# Altium PCB Bela_Cape.pcbdoc
Units mil, origin at the board's own origin, x right, y up, seen from the top; angles counter-clockwise.
Board outline 2630.4 x 1770.7 mil, 4 copper layers (Top Layer, In1.Cu, In2.Cu, Bottom Layer), stack 1.4 mil thick; 23 components, 9 nets, 128 pads, 12 vias.
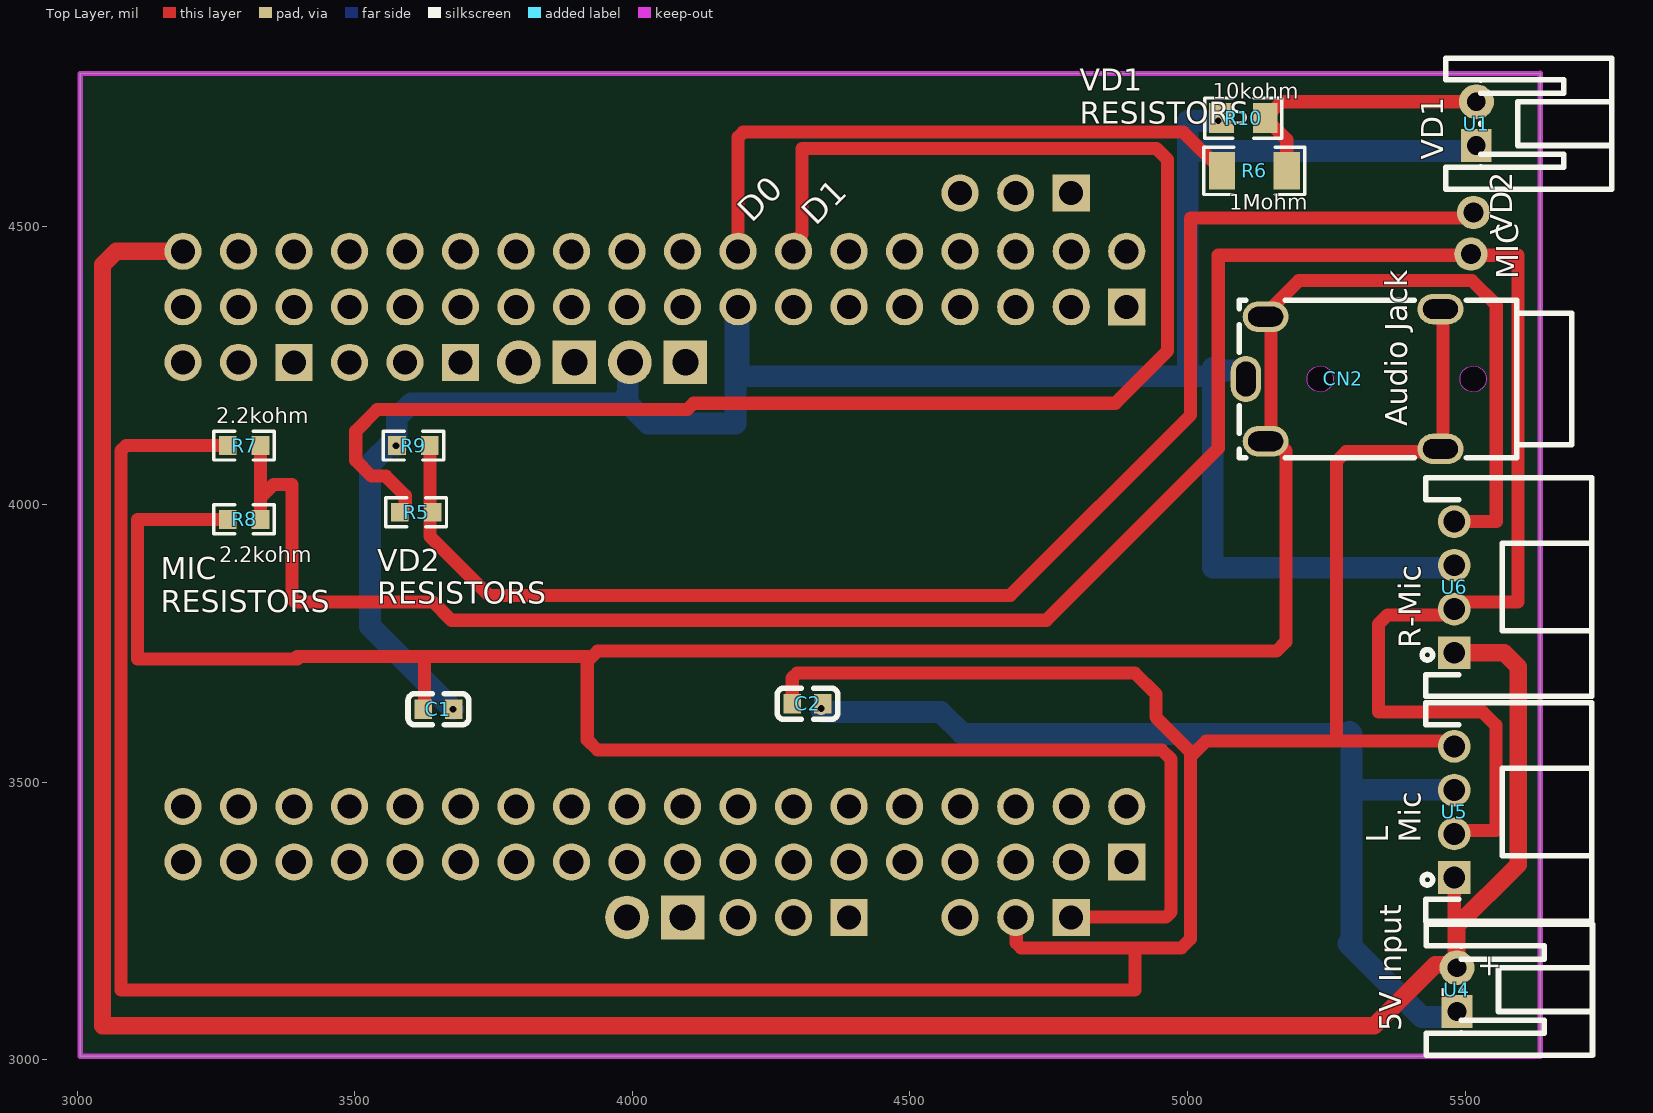
[diagram p0: Top Layer view]
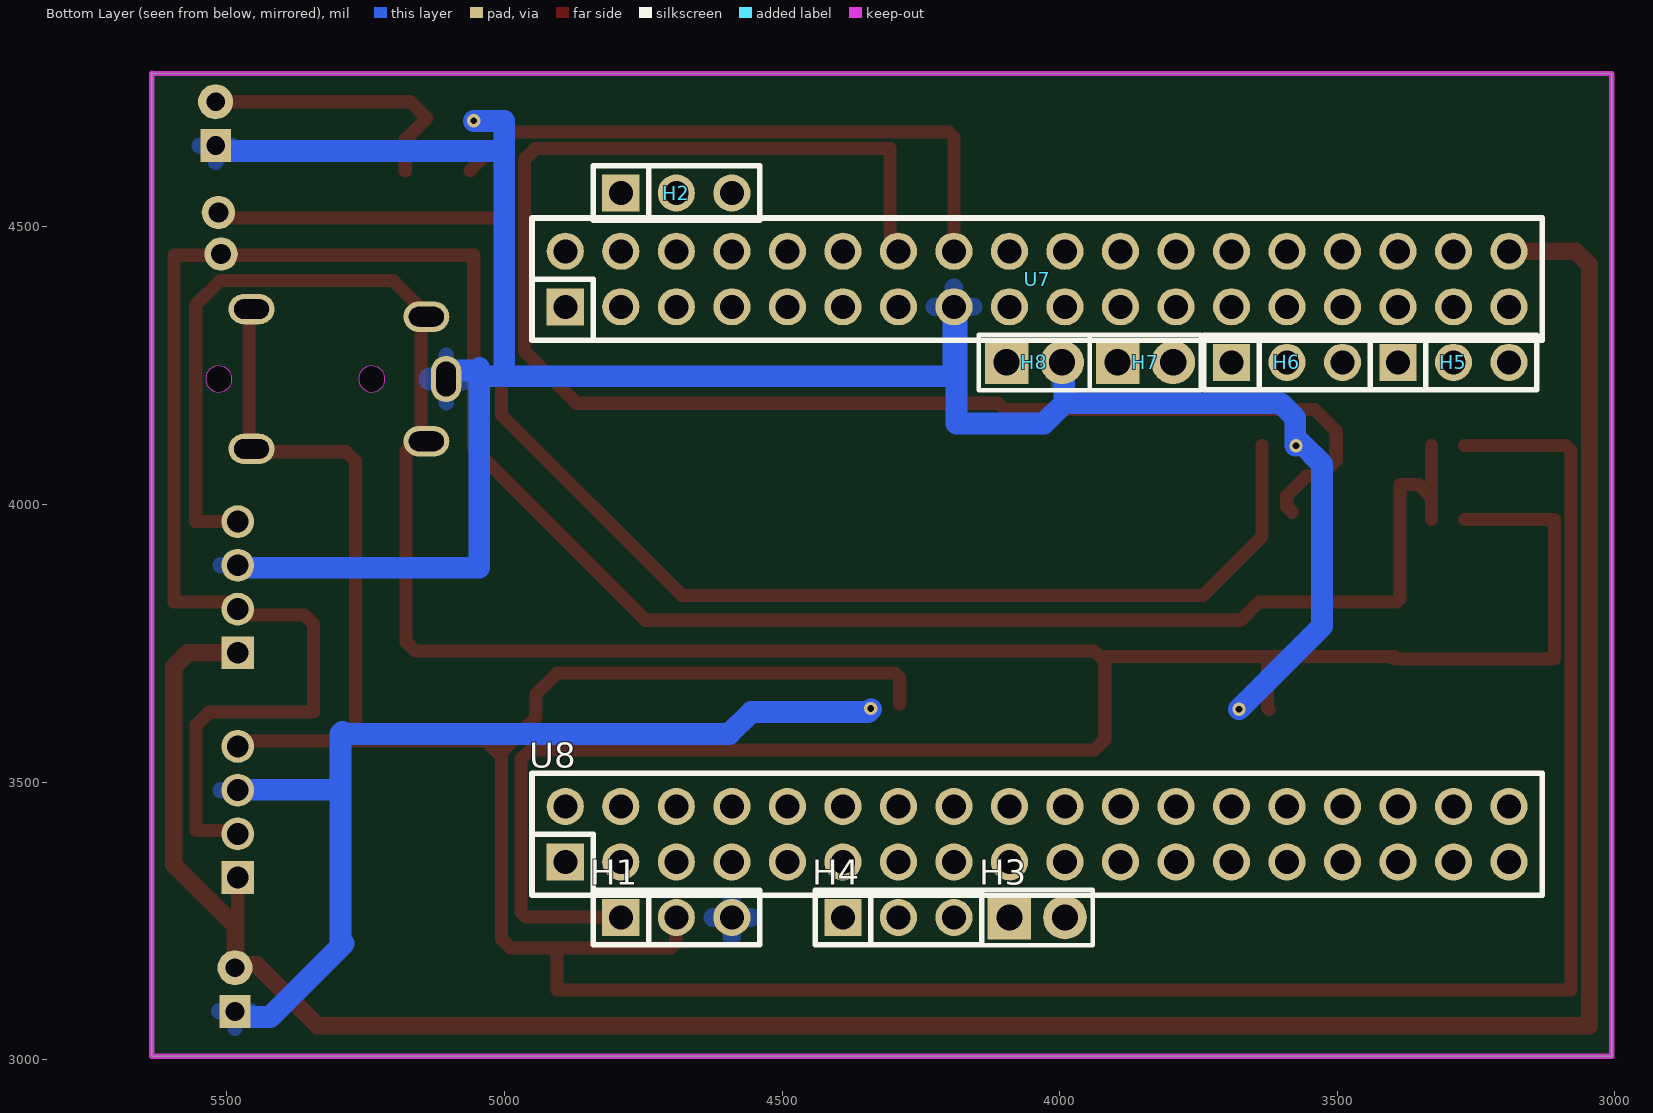
[diagram p1: Bottom Layer view, seen from below]

## Layer stack, top to bottom
Top Layer: signal copper (thickness not stored)
Dielectric1: surface 0.1, FR4, Dk 4.5
In1.Cu: signal copper (thickness not stored)
dielectric 2: surface 1.2, FR4, Dk 4.5
In2.Cu: signal copper (thickness not stored)
dielectric 3: surface 0.1, FR4, Dk 4.5
Bottom Layer: signal copper (thickness not stored)

## Board outline
3005,3006 3005.4,4776 5635.4,4776.7 5635.4,3006

## Design rules (kind name [scope] priority, off if disabled: settings)
BoardOutlineClearance safeClearance [All] p0: genericclearance=10 ignorepadtopadclearanceinfootprint=FALSE except(0: Arc-SplitContinuation Track-SplitContinuation SMDPad-SplitContinuation THPad-SplitContinuation Via-SplitContinuation Fill-SplitContinuation Poly-SplitContinuation Region-SplitContinuation Text-SplitContinuation)
BoardOutlineClearance Plane_innerPlane [All] p0: genericclearance=10 ignorepadtopadclearanceinfootprint=FALSE except(0: Arc-SplitContinuation Track-SplitContinuation SMDPad-SplitContinuation THPad-SplitContinuation Via-SplitContinuation Fill-SplitContinuation Poly-SplitContinuation Region-SplitContinuation Text-SplitContinuation)
BoardOutlineClearance Copper_CopperRegion [All] p0: genericclearance=10 ignorepadtopadclearanceinfootprint=FALSE except(0: Arc-SplitContinuation Track-SplitContinuation SMDPad-SplitContinuation THPad-SplitContinuation Via-SplitContinuation Fill-SplitContinuation Poly-SplitContinuation Region-SplitContinuation Text-SplitContinuation)
BoardOutlineClearance Copper_CopperRegion1 [All] p0: genericclearance=10 ignorepadtopadclearanceinfootprint=FALSE except(0: Arc-SplitContinuation Track-SplitContinuation SMDPad-SplitContinuation THPad-SplitContinuation Via-SplitContinuation Fill-SplitContinuation Poly-SplitContinuation Region-SplitContinuation Text-SplitContinuation)
BoardOutlineClearance Copper_CopperRegion2 [All] p0: genericclearance=10 ignorepadtopadclearanceinfootprint=FALSE except(0: Arc-SplitContinuation Track-SplitContinuation SMDPad-SplitContinuation THPad-SplitContinuation Via-SplitContinuation Fill-SplitContinuation Poly-SplitContinuation Region-SplitContinuation Text-SplitContinuation)
BoardOutlineClearance Copper_CopperRegion3 [All] p0: genericclearance=10 ignorepadtopadclearanceinfootprint=FALSE except(0: Arc-SplitContinuation Track-SplitContinuation SMDPad-SplitContinuation THPad-SplitContinuation Via-SplitContinuation Fill-SplitContinuation Poly-SplitContinuation Region-SplitContinuation Text-SplitContinuation)
BoardOutlineClearance Copper_CopperRegion4 [All] p0: genericclearance=10 ignorepadtopadclearanceinfootprint=FALSE except(0: Arc-SplitContinuation Track-SplitContinuation SMDPad-SplitContinuation THPad-SplitContinuation Via-SplitContinuation Fill-SplitContinuation Poly-SplitContinuation Region-SplitContinuation Text-SplitContinuation)
BoardOutlineClearance Copper_CopperRegion5 [All] p0: genericclearance=10 ignorepadtopadclearanceinfootprint=FALSE except(0: Arc-SplitContinuation Track-SplitContinuation SMDPad-SplitContinuation THPad-SplitContinuation Via-SplitContinuation Fill-SplitContinuation Poly-SplitContinuation Region-SplitContinuation Text-SplitContinuation)
BoardOutlineClearance Copper_CopperRegion6 [All] p0: genericclearance=10 ignorepadtopadclearanceinfootprint=FALSE except(0: Arc-SplitContinuation Track-SplitContinuation SMDPad-SplitContinuation THPad-SplitContinuation Via-SplitContinuation Fill-SplitContinuation Poly-SplitContinuation Region-SplitContinuation Text-SplitContinuation)
BoardOutlineClearance Copper_CopperRegion7 [All] p0: genericclearance=10 ignorepadtopadclearanceinfootprint=FALSE except(0: Arc-SplitContinuation Track-SplitContinuation SMDPad-SplitContinuation THPad-SplitContinuation Via-SplitContinuation Fill-SplitContinuation Poly-SplitContinuation Region-SplitContinuation Text-SplitContinuation)
BoardOutlineClearance Copper_CopperRegion8 [All] p0: genericclearance=10 ignorepadtopadclearanceinfootprint=FALSE except(0: Arc-SplitContinuation Track-SplitContinuation SMDPad-SplitContinuation THPad-SplitContinuation Via-SplitContinuation Fill-SplitContinuation Poly-SplitContinuation Region-SplitContinuation Text-SplitContinuation)
BoardOutlineClearance Copper_CopperRegion9 [All] p0: genericclearance=10 ignorepadtopadclearanceinfootprint=FALSE except(0: Arc-SplitContinuation Track-SplitContinuation SMDPad-SplitContinuation THPad-SplitContinuation Via-SplitContinuation Fill-SplitContinuation Poly-SplitContinuation Region-SplitContinuation Text-SplitContinuation)
BoardOutlineClearance Copper_CopperRegion10 [All] p0: genericclearance=10 ignorepadtopadclearanceinfootprint=FALSE except(0: Arc-SplitContinuation Track-SplitContinuation SMDPad-SplitContinuation THPad-SplitContinuation Via-SplitContinuation Fill-SplitContinuation Poly-SplitContinuation Region-SplitContinuation Text-SplitContinuation)
BoardOutlineClearance Copper_CopperRegion11 [All] p0: genericclearance=10 ignorepadtopadclearanceinfootprint=FALSE except(0: Arc-SplitContinuation Track-SplitContinuation SMDPad-SplitContinuation THPad-SplitContinuation Via-SplitContinuation Fill-SplitContinuation Poly-SplitContinuation Region-SplitContinuation Text-SplitContinuation)
BoardOutlineClearance otherClearance [All] p0: genericclearance=10 ignorepadtopadclearanceinfootprint=FALSE except(0: Arc-SplitContinuation Track-SplitContinuation SMDPad-SplitContinuation THPad-SplitContinuation Via-SplitContinuation Fill-SplitContinuation Poly-SplitContinuation Region-SplitContinuation Text-SplitContinuation)
Clearance safeClearance [All] p1: gap=7 ignorepadtopadclearanceinfootprint=FALSE
Clearance Plane_innerPlane [All] p1: gap=7 ignorepadtopadclearanceinfootprint=FALSE
Clearance Copper_CopperRegion [All] p1: gap=7 ignorepadtopadclearanceinfootprint=FALSE
Clearance Copper_CopperRegion1 [All] p1: gap=7 ignorepadtopadclearanceinfootprint=FALSE
Clearance Copper_CopperRegion2 [All] p1: gap=7 ignorepadtopadclearanceinfootprint=FALSE
Clearance Copper_CopperRegion3 [All] p1: gap=7 ignorepadtopadclearanceinfootprint=FALSE
Clearance Copper_CopperRegion4 [All] p1: gap=7 ignorepadtopadclearanceinfootprint=FALSE
Clearance Copper_CopperRegion5 [All] p1: gap=7 ignorepadtopadclearanceinfootprint=FALSE
Clearance Copper_CopperRegion6 [All] p1: gap=7 ignorepadtopadclearanceinfootprint=FALSE
Clearance Copper_CopperRegion7 [All] p1: gap=7 ignorepadtopadclearanceinfootprint=FALSE
Clearance Copper_CopperRegion8 [All] p1: gap=7 ignorepadtopadclearanceinfootprint=FALSE
Clearance Copper_CopperRegion9 [All] p1: gap=7 ignorepadtopadclearanceinfootprint=FALSE
Clearance Copper_CopperRegion10 [All] p1: gap=7 ignorepadtopadclearanceinfootprint=FALSE
Clearance Copper_CopperRegion11 [All] p1: gap=7 ignorepadtopadclearanceinfootprint=FALSE
Clearance otherClearance [All] p1: gap=7 ignorepadtopadclearanceinfootprint=FALSE
DiffPairsRouting differentialPair [All] p1: maxuncoupledlength=10 minlimit=6 maxlimit=Infinity mostfreqgap=6 toplayer_minwidth=5 toplayer_prefwidth=10 toplayer_maxwidth=100 bottomlayer_minwidth=5 bottomlayer_prefwidth=10 bottomlayer_maxwidth=100 midlayer1_minwidth=5 midlayer1_prefwidth=10 midlayer1_maxwidth=100 midlayer2_minwidth=5 midlayer2_prefwidth=10 midlayer2_maxwidth=100
PasteMaskExpansion Common [All] p1: expansion=0
PlaneConnect innerPlane [All] p1: planeconnectstyle=Relief reliefexpansion=20 reliefentries=4 reliefconductorwidth=10 reliefairgap=10
PolygonConnect CopperRegion [All] p1: connectstyle=Relief reliefentries=4 reliefconductorwidth=0 polygonreliefangle="90 Angle" airgapwidth=1
PolygonConnect CopperRegion1 [All] p1: connectstyle=Relief reliefentries=4 reliefconductorwidth=0 polygonreliefangle="90 Angle" airgapwidth=1
PolygonConnect CopperRegion2 [All] p1: connectstyle=Relief reliefentries=4 reliefconductorwidth=0 polygonreliefangle="90 Angle" airgapwidth=1
PolygonConnect CopperRegion3 [All] p1: connectstyle=Relief reliefentries=4 reliefconductorwidth=0 polygonreliefangle="90 Angle" airgapwidth=1
PolygonConnect CopperRegion4 [All] p1: connectstyle=Relief reliefentries=4 reliefconductorwidth=0 polygonreliefangle="90 Angle" airgapwidth=1
PolygonConnect CopperRegion5 [All] p1: connectstyle=Relief reliefentries=4 reliefconductorwidth=0 polygonreliefangle="90 Angle" airgapwidth=1
PolygonConnect CopperRegion6 [All] p1: connectstyle=Relief reliefentries=4 reliefconductorwidth=0 polygonreliefangle="90 Angle" airgapwidth=1
PolygonConnect CopperRegion7 [All] p1: connectstyle=Relief reliefentries=4 reliefconductorwidth=0 polygonreliefangle="90 Angle" airgapwidth=1
PolygonConnect CopperRegion8 [All] p1: connectstyle=Relief reliefentries=4 reliefconductorwidth=0 polygonreliefangle="90 Angle" airgapwidth=1
PolygonConnect CopperRegion9 [All] p1: connectstyle=Relief reliefentries=4 reliefconductorwidth=0 polygonreliefangle="90 Angle" airgapwidth=1
PolygonConnect CopperRegion10 [All] p1: connectstyle=Relief reliefentries=4 reliefconductorwidth=0 polygonreliefangle="90 Angle" airgapwidth=1
PolygonConnect CopperRegion11 [All] p1: connectstyle=Relief reliefentries=4 reliefconductorwidth=0 polygonreliefangle="90 Angle" airgapwidth=1
RoutingVias viaSize [All] p1: viastyle="Through Hole" holewidth=12.0078 minholewidth=11.811 maxholewidth=236.2204 width=12.0078 minwidth=11.811 maxwidth=236.2204
SolderMaskExpansion Common [All] p1: useseparateexpansions=TRUE expansion=0 expansionbottom=0
Width trackWidth [All] p1: maxlimit=100 minlimit=5 preferedwidth=10

## Components (designator, comment, footprint, x,y, rotation, side; value= is the part's Value field where it differs from the comment)
C1 "10uF" C0603 3650.4,3631 r0 top
C2 "10uF" C0603 4315.4,3641 r0 top
CN2 "PJ-322环保" AUDIO-TH_HOOYA_PJ-322 5280.4,4226 r180 top
H1 "1x3单排直针2.54mm间距" HDR-TH_3P-P2.54-V-M 4690.4,3256 r180 bottom
H2 "1x3单排直针2.54mm间距" HDR-TH_3P-P2.54-V-M 4690.4,4561 r180 bottom
H3 "HX PH254-01-02-Z-L11.5 male header connector" HDR-TH_2P-P2.54-V-M 4040.4,3256 r180 bottom
H4 "1x3单排直针2.54mm间距" HDR-TH_3P-P2.54-V-M 4290.4,3256 r180 bottom
H5 "1x3单排直针2.54mm间距" HDR-TH_3P-P2.54-V-M 3290.4,4256 r180 bottom
H6 "1x3单排直针2.54mm间距" HDR-TH_3P-P2.54-V-M 3590.4,4256 r180 bottom
H7 "HX PH254-01-02-Z-L11.5 male header connector" HDR-TH_2P-P2.54-V-M 3845.4,4256 r180 bottom
H8 "HX PH254-01-02-Z-L11.5 male header connector" HDR-TH_2P-P2.54-V-M 4045.4,4256 r180 bottom
R5 "2.2kΩ" R0603 3610.4,3986 r0 top
R6 "1MΩ" R1206 5120.4,4601 r0 top
R7 "2.2kΩ" R0603 3300.4,4106 r0 top
R8 "2.2kΩ" R0603 3300.4,3973.2 r0 top
R9 "2.2kΩ" R0603 3605.4,4106 r0 top
R10 "10kΩ" R0805 5100.4,4696 r0 top
U1 "S2B-PH-K-S(LF)(SN)" CONN-TH_S2B-PH-K-S-LF-SN 5520.4,4686 r270 top
U4 "S2B-PH-K-S(LF)(SN)" CONN-TH_S2B-PH-K-S-LF-SN 5485.4,3126 r270 top
U5 "S4B-PH-K-S(LF)(SN)" CONN-TH_4P-P2.00_S4B-PH-K-S-LF-SN 5480.4,3446 r90 top
U6 "S4B-PH-K-S(LF)(SN)" CONN-TH_4P-P2.00_S4B-PH-K-S-LF-SN 5480.4,3851 r90 top
U7 "HMNDSH25-1801A121TBB" HDR-TH_36P-P2.54-V-F-R2-C18-S2.54-2 4040.4,4406 r180 bottom
U8 "HMNDSH25-1801A121TBB" HDR-TH_36P-P2.54-V-F-R2-C18-S2.54-2 4040.4,3406 r180 bottom

## Footprints (in the part's own frame and the unit in brackets; to place one, negate y for a bottom-side part, rotate by r counter-clockwise, add the part's x,y. Pads: shape width x height; smd on the part's side, far side on the other; paste and mask are expansions set on the pad)
AUDIO-TH_HOOYA_PJ-322 [mil]
  oval 55.1x82.7 hole 35.4 slot 63 at 90 deg paste+0 mask+2: 1(175.2,0)
  oval 82.7x55.1 hole 35.4 slot 63 at 0 deg paste+0 mask+2: 2(139.7,112.2) 3(-175.2,126) 3(-175.2,-126) 4(139.7,-112.2)
  Board Outline Layer lines w0.1: 64.9,0 64.5,-4.2 63.4,-8.3 61.6,-12.1 59.1,-15.5 56,-18.5 52.5,-20.8 48.6,-22.4 44.5,-23.4 40.2,-23.6 36,-23 32,-21.7 28.3,-19.7 25,-17.1 22.2,-13.9 20,-10.2 18.5,-6.3 17.8,-2.1 17.8,2.1 18.5,6.3 20,10.3 22.2,13.9 25,17.1 28.3,19.7 32,21.7 36,23 40.2,23.6 44.5,23.4 48.6,22.5 52.5,20.8 56,18.5 59.1,15.6 61.6,12.1 63.4,8.3 64.5,4.2 64.9,0 ; -210.7,0 -211.1,-4.2 -212.2,-8.3 -214,-12.1 -216.5,-15.5 -219.6,-18.5 -223.1,-20.8 -227,-22.4 -231.1,-23.4 -235.4,-23.6 -239.6,-23 -243.6,-21.7 -247.3,-19.7 -250.6,-17.1 -253.4,-13.9 -255.6,-10.2 -257.1,-6.3 -257.8,-2.1 -257.8,2.1 -257.1,6.3 -255.6,10.3 -253.4,13.9 -250.6,17.1 -247.3,19.7 -243.6,21.7 -239.6,23 -235.4,23.6 -231.1,23.4 -227,22.5 -223.1,20.8 -219.6,18.5 -216.5,15.6 -214,12.1 -212.2,8.3 -211.1,4.2 -210.7,0
  Board Outline Layer region: -210.7,0 -211.1,-4.2 -212.2,-8.3 -214,-12.1 -216.5,-15.5 -219.6,-18.5 -223.1,-20.8 -227,-22.4 -231.1,-23.4 -235.4,-23.6 -239.6,-23 -243.6,-21.7 -247.3,-19.7 -250.6,-17.1 -253.4,-13.9 -255.6,-10.2 -257.1,-6.3 -257.8,-2.1 -257.8,2.1 -257.1,6.3 -255.6,10.3 -253.4,13.9 -250.6,17.1 -247.3,19.7 -243.6,21.7 -239.6,23 -235.4,23.6 -231.1,23.4 -227,22.5 -223.1,20.8 -219.6,18.5 -216.5,15.6 -214,12.1 -212.2,8.3 -211.1,4.2
  Board Outline Layer region: -210.7,0 -211.1,-4.2 -212.2,-8.3 -214,-12.1 -216.5,-15.5 -219.6,-18.5 -223.1,-20.8 -227,-22.4 -231.1,-23.4 -235.4,-23.6 -239.6,-23 -243.6,-21.7 -247.3,-19.7 -250.6,-17.1 -253.4,-13.9 -255.6,-10.2 -257.1,-6.3 -257.8,-2.1 -257.8,2.1 -257.1,6.3 -255.6,10.3 -253.4,13.9 -250.6,17.1 -247.3,19.7 -243.6,21.7 -239.6,23 -235.4,23.6 -231.1,23.4 -227,22.5 -223.1,20.8 -219.6,18.5 -216.5,15.6 -214,12.1 -212.2,8.3 -211.1,4.2
  Board Outline Layer region: 64.9,0 64.5,-4.2 63.4,-8.3 61.6,-12.1 59.1,-15.5 56,-18.5 52.5,-20.8 48.6,-22.4 44.5,-23.4 40.2,-23.6 36,-23 32,-21.7 28.3,-19.7 25,-17.1 22.2,-13.9 20,-10.2 18.5,-6.3 17.8,-2.1 17.8,2.1 18.5,6.3 20,10.3 22.2,13.9 25,17.1 28.3,19.7 32,21.7 36,23 40.2,23.6 44.5,23.4 48.6,22.5 52.5,20.8 56,18.5 59.1,15.6 61.6,12.1 63.4,8.3 64.5,4.2
  Board Outline Layer region: 64.9,0 64.5,-4.2 63.4,-8.3 61.6,-12.1 59.1,-15.5 56,-18.5 52.5,-20.8 48.6,-22.4 44.5,-23.4 40.2,-23.6 36,-23 32,-21.7 28.3,-19.7 25,-17.1 22.2,-13.9 20,-10.2 18.5,-6.3 17.8,-2.1 17.8,2.1 18.5,6.3 20,10.3 22.2,13.9 25,17.1 28.3,19.7 32,21.7 36,23 40.2,23.6 44.5,23.4 48.6,22.5 52.5,20.8 56,18.5 59.1,15.6 61.6,12.1 63.4,8.3 64.5,4.2
  Multi-Layer board cut-out: -210.7,0 -211.1,-4.2 -212.2,-8.3 -214,-12.1 -216.5,-15.5 -219.6,-18.5 -223.1,-20.8 -227,-22.4 -231.1,-23.4 -235.4,-23.6 -239.6,-23 -243.6,-21.7 -247.3,-19.7 -250.6,-17.1 -253.4,-13.9 -255.6,-10.2 -257.1,-6.3 -257.8,-2.1 -257.8,2.1 -257.1,6.3 -255.6,10.3 -253.4,13.9 -250.6,17.1 -247.3,19.7 -243.6,21.7 -239.6,23 -235.4,23.6 -231.1,23.4 -227,22.5 -223.1,20.8 -219.6,18.5 -216.5,15.6 -214,12.1 -212.2,8.3 -211.1,4.2
  Multi-Layer board cut-out: 64.9,0 64.5,-4.2 63.4,-8.3 61.6,-12.1 59.1,-15.5 56,-18.5 52.5,-20.8 48.6,-22.4 44.5,-23.4 40.2,-23.6 36,-23 32,-21.7 28.3,-19.7 25,-17.1 22.2,-13.9 20,-10.2 18.5,-6.3 17.8,-2.1 17.8,2.1 18.5,6.3 20,10.3 22.2,13.9 25,17.1 28.3,19.7 32,21.7 36,23 40.2,23.6 44.5,23.4 48.6,22.5 52.5,20.8 56,18.5 59.1,15.6 61.6,12.1 63.4,8.3 64.5,4.2
  silkscreen extent -412,-142 187,142
C0603 [mil]
  rect 31.5x35.4 smd: 1(-27.5,0) 2(27.6,0)
  silkscreen extent -55,-28 55,28
CONN-TH_4P-P2.00_S4B-PH-K-S-LF-SN [mil]
  rect 59.1x59.1 hole 39.4: 1(-118.1,0)
  round 59.1 hole 39.4: 2(-39.4,0) 3(39.4,0) 4(118.1,0)
  silkscreen extent -197,-248 197,58
CONN-TH_S2B-PH-K-S-LF-SN [mil]
  rect 59.1x55.1 hole 33.5: 1(39.4,0)
  round 63 hole 33.5: 2(-39.4,0)
  silkscreen extent -118,-55 118,244
HDR-TH_2P-P2.54-V-M [mil]
  rect 78.7x78.7 hole 47.2: 1(-50,0)
  round 78.7 hole 47.2: 2(50,0)
  silkscreen extent -100,-50 100,50
HDR-TH_3P-P2.54-V-M [mil]
  rect 66.9x66.9 hole 43.3: 1(-100,0)
  round 66.9 hole 43.3: 2(0,0) 3(100,0)
  silkscreen extent -150,-49 150,49
HDR-TH_36P-P2.54-V-F-R2-C18-S2.54-2 [mil]
  rect 66.9x66.9 hole 43.3: 1(-850,-50)
  round 66.9 hole 43.3: 2(-850,50) 3(-750,-50) 4(-750,50) 5(-650,-50) 6(-650,50) 7(-550,-50) 8(-550,50) 9(-450,-50) 10(-450,50) 11(-350,-50) 12(-350,50) 13(-250,-50) 14(-250,50) 15(-150,-50) 16(-150,50) 17(-50,-50) 18(-50,50) 19(50,-50) 20(50,50) 21(150,-50) 22(150,50) 23(250,-50) 24(250,50) 25(350,-50) 26(350,50) 27(450,-50) 28(450,50) 29(550,-50) 30(550,50) 31(650,-50) 32(650,50) 33(750,-50) 34(750,50) 35(850,-50) 36(850,50)
  silkscreen extent -910,-110 910,110
R0603 [mil]
  rect 31.8x34 smd paste-3937 mask+2: 1(-29.6,0) 2(29.7,0)
  silkscreen extent -54,-26 55,26
R0805 [mil]
  rect 44.6x54.2 smd paste-3937 mask+2: 1(-39.3,0) 2(39.4,0)
  silkscreen extent -69,-36 69,36
R1206 [mil]
  rect 47.5x67 smd paste-3937 mask+2: 1(-58.2,0) 2(58.3,0)
  silkscreen extent -91,-42 91,42

## Free pads (board coordinates)
  round 60 hole 36: 1(5510.4,4451) 1(5515.4,4526)

## Via types
v1: diameter 24, hole 12, Top Layer to Bottom Layer, 12 vias

## Nets (pads, with @x,y where several pads share a name; then routed paths per layer and width w, separated by ;. In a path a pad name is that pad's centre, name@x,y a point inside that pad or via, vN(x,y) a via of type N, cw(c..) or ccw(c..) an arc to the next point about the centre after c; other vN are vias at no path point)
D0: R6.1 U7.16 | length 1109.8
  Top Layer w23.6: U7.16 4190.4,4661.4 4199.6,4670.6 4992.6,4670.6 R6.1
D1: R5.1 U7.14 | length 2917.2
  Top Layer w23.6: R5.1 3590.8,3996 3590.8,4016 3555.8,4051 3529.9,4051 3501.6,4079.3 3501.6,4132.2 3540.4,4171 4098.9,4171 4110.2,4182.3 4869.9,4182.3 4964.1,4276.6 4964.1,4621 4944.2,4641 4305.4,4641 4305.4,4486.7 U7.14@4286.5,4467.8
GND: C1.2 C2.2 CN2.1 H1.3 H8.2 R9.1 R10.1 U1.1 U4.1 U5.3 U6.3 U7.15 | length 6238.2
  Bottom Layer w23.6: 5295.4,3481 5300.4,3486
  Bottom Layer w39.4: v1@3565.4,4111 3527.3,4072.8 3527.3,3780.5 v1(3676.8,3631) ; v1@3575.4,4106 3575.4,4156 3601.7,4182.3 3976.7,4182.3 ; v1(3991.7,4256) 3991.7,4197.3 ; v1@4339.7,3631 4344.7,3626 4555.4,3626 4594.8,3586.6 5295.4,3586.6 ; 5045.4,4246 5045.4,4241 ; v1(5055.4,4691) 5000.4,4691 5000.4,4636.6 ; v1(5105.2,4236) 5100.2,4241 5045.4,4241 ; 5289.9,3208.8 5295.4,3203.3 ; 5291.7,3590.4 5295.4,3586.6 ; 5300.4,3486 v1(5475.4,3486) 5479.8,3486 U5.3 ; v1(5480.4,3896) 5470.4,3886 5045.4,3886 5045.4,4241 ; v1(5485.4,3076.6) 5422.1,3076.6 5295.4,3203.3 ; v1(5520.4,4636.6) 5000.4,4636.6 ; 3976.7,4182.3 3991.7,4197.3 ; 3976.7,4182.3 3991.7,4182.3 ; 3991.7,4182.3 3991.7,4197.3 ; 3991.7,4182.3 4028,4146 4185.4,4146 4185.4,4234 ; 4185.4,4234 4185.4,4350.4 v1(4191.5,4356.5) 4191.5,4240.1 4185.4,4234 ; 4185.4,4234 4188.5,4231 5000.4,4231 ; 5000.4,4231 5035.4,4231 5045.4,4241 ; 5000.4,4231 5000.4,4636.6 ; 5295.4,3203.3 5295.4,3481 5295.4,3586.6
  other v1: 4591.5,3256.5 4340.4,3632.5 3574.1,4106
L: C2.1 CN2.3 H1.2 R7.1 U5.4 | length 6081.5
  Top Layer w23.6: R7.1 3087.7,4106 3079,4097.3 3079,3125.4 4905.4,3125.4 4905.4,3201 ; C2.1 4287.9,3687.6 4296.6,3696.4 4905.2,3696.4 4942.9,3658.7 4942.9,3616.9 5009.6,3550.2 ; H1.2@4691.5,3256.5 4691.5,3209.9 4700.4,3201 4905.4,3201 ; U5.4 5470.7,3573.8 5265,3573.8 ; CN2.3@5480.6,4347 5460.4,4347 5460.4,4114.8 5440.6,4095 5285.4,4095 5268.7,4078.3 5268.7,3577.6 5265,3573.8 ; 4905.4,3201 4988.7,3201 5005.4,3217.7 5005.4,3546 5009.6,3550.2 ; 5009.6,3550.2 5033.3,3573.8 5265,3573.8
MIC: pad.1@5510.4,4451 R7.2 R8.2 U5.2 U6.2 | length 4616.1
  Top Layer w23.6: R8.2 R7.2 ; 3330.1,4012.6 3353.7,4036.2 3387.1,4036.2 3387.1,3829.9 3392.7,3824.4 3640.8,3824.4 3673.8,3791.4 4745.8,3791.4 5055.4,4101 5055.4,4449 5595.4,4449 5595.4,3824.6 5481.6,3824.6 5458,3801 5360.4,3801 5343.7,3784.3 5343.7,3626 5531.8,3626 5555.4,3602.4 5555.4,3412.8 U5.2@5507.8,3412.8
R: C1.1 CN2.2 CN2.4 H1.1 R8.1 U6.4 | length 5793.5
  Top Layer w23.6: R8.1 3108.6,3973.2 3108.6,3721.6 3396.2,3721.6 3396.2,3726 3625.4,3726 ; C1.1 3625.4,3633.5 3625.4,3726 ; H1.1@4791.5,3256.5 4961,3256.5 4970.4,3266 4970.4,3541 4953.7,3557.7 3937.1,3557.7 3918.7,3576.1 3918.7,3717.4 ; U6.4 5556.1,3969.1 5556.1,4359.4 5512.4,4403.2 5200.1,4403.2 5150.6,4353.7 5150.6,4123.8 5177.1,4097.3 5177.1,3752.7 5160.4,3736 3937.3,3736 3918.7,3717.4 ; 3625.4,3726 3918.7,3726 3918.7,3717.4
VD: R6.2 R10.2 U1.2 | length 503.9
  Top Layer w23.6: R6.2 5178.7,4657.1 R10.2 5169.2,4725.4 U1.2
VD2: pad.1@5515.4,4526 R5.2 R9.2 | length 2576.3
  Top Layer w23.6: R5.2@3635.1,3986.3 3635.1,3942.7 3741.5,3836.3 4680.8,3836.3 5005.4,4161 5005.4,4516 5505.4,4516 pad.1@5515.4,4526 ; R5.2@3635.1,3991.3 R9.2
VIN: U4.2 U5.1 U6.1 U7.36 | length 4885.8
  Top Layer w23.6: U4.2@5480.4,3170.4 U5.1
  Top Layer w31.5: U7.36@3191.5,4456.5 3070.4,4456.5 3045.4,4431.5 3045.4,3061 5336.5,3061 5446.5,3171 5479.8,3171 5480.4,3170.4 U4.2 5485.4,3241 5595.4,3351 5595.4,3707.9 5570.4,3732.9 U6.1
pads on no net: H2.1 H2.2 H2.3 H3.1 H3.2 H4.1 H4.2 H4.3 H5.1 H5.2 H5.3 H6.1 H6.2 H6.3 H7.1 H7.2 H8.1 U7.1 U7.2 U7.3 U7.4 U7.5 U7.6 U7.7 U7.8 U7.9 U7.10 U7.11 U7.12 U7.13 U7.17 U7.18 U7.19 U7.20 U7.21 U7.22 U7.23 U7.24 U7.25 U7.26 U7.27 U7.28 U7.29 U7.30 U7.31 U7.32 U7.33 U7.34 U7.35 U8.1 U8.2 U8.3 U8.4 U8.5 U8.6 U8.7 U8.8 U8.9 U8.10 U8.11 U8.12 U8.13 U8.14 U8.15 U8.16 U8.17 U8.18 U8.19 U8.20 U8.21 U8.22 U8.23 U8.24 U8.25 U8.26 U8.27 U8.28 U8.29 U8.30 U8.31 U8.32 U8.33 U8.34 U8.35 U8.36

## Polygon pours and split planes (outlines as drawn)
GND on Bottom Layer (solid, remove dead copper, pour order 0): 5645.4,4786 5645.4,3006.1 3000,3010.1 3000.4,4786

## Keep-outs
Board Outline Layer:
  the board outline again, w10

## Silkscreen, mask and mechanical layers (free items; w line width, h text height)
Top Silkscreen Layer:
  text "10kohm" at 5045.4,4731 h27.6
  text "VD1  / RESISTORS" at 4805.4,4686 h39.4
  text "VD1" at 5460.4,4621 h39.4 r90
  text "1Mohm" at 5075.4,4531 h27.6
  text "D0" at 4215.4,4505.4 h43.3 r45
  text "D1" at 4330.4,4500.4 h43.3 r45
  text "VD2" at 5585.4,4486 h39.4 r90
  text "MIC" at 5595.4,4406 h39.4 r90
  text "2.2kohm" at 3250.4,4146 h27.6
  text "Audio Jack" at 5395.4,4141 h39.4 r90
  text "2.2kohm" at 3255.4,3896 h27.6
  text "VD2  / RESISTORS" at 3540.4,3821 h39.4
  text "MIC  / RESISTORS" at 3150.4,3806 h39.4
  text "R-Mic" at 5420.4,3741 h39.4 r90
  text "L / Mic" at 5420.4,3391 h39.4 r90
  text "+" at 5560.4,3146 h39.4 r90
  text "-" at 5475.4,3111 h39.4 r90
  text "5V Input" at 5385.4,3051 h39.4 r90